# EAGLE board Soft_Servo (EAGLE 7.2.0)
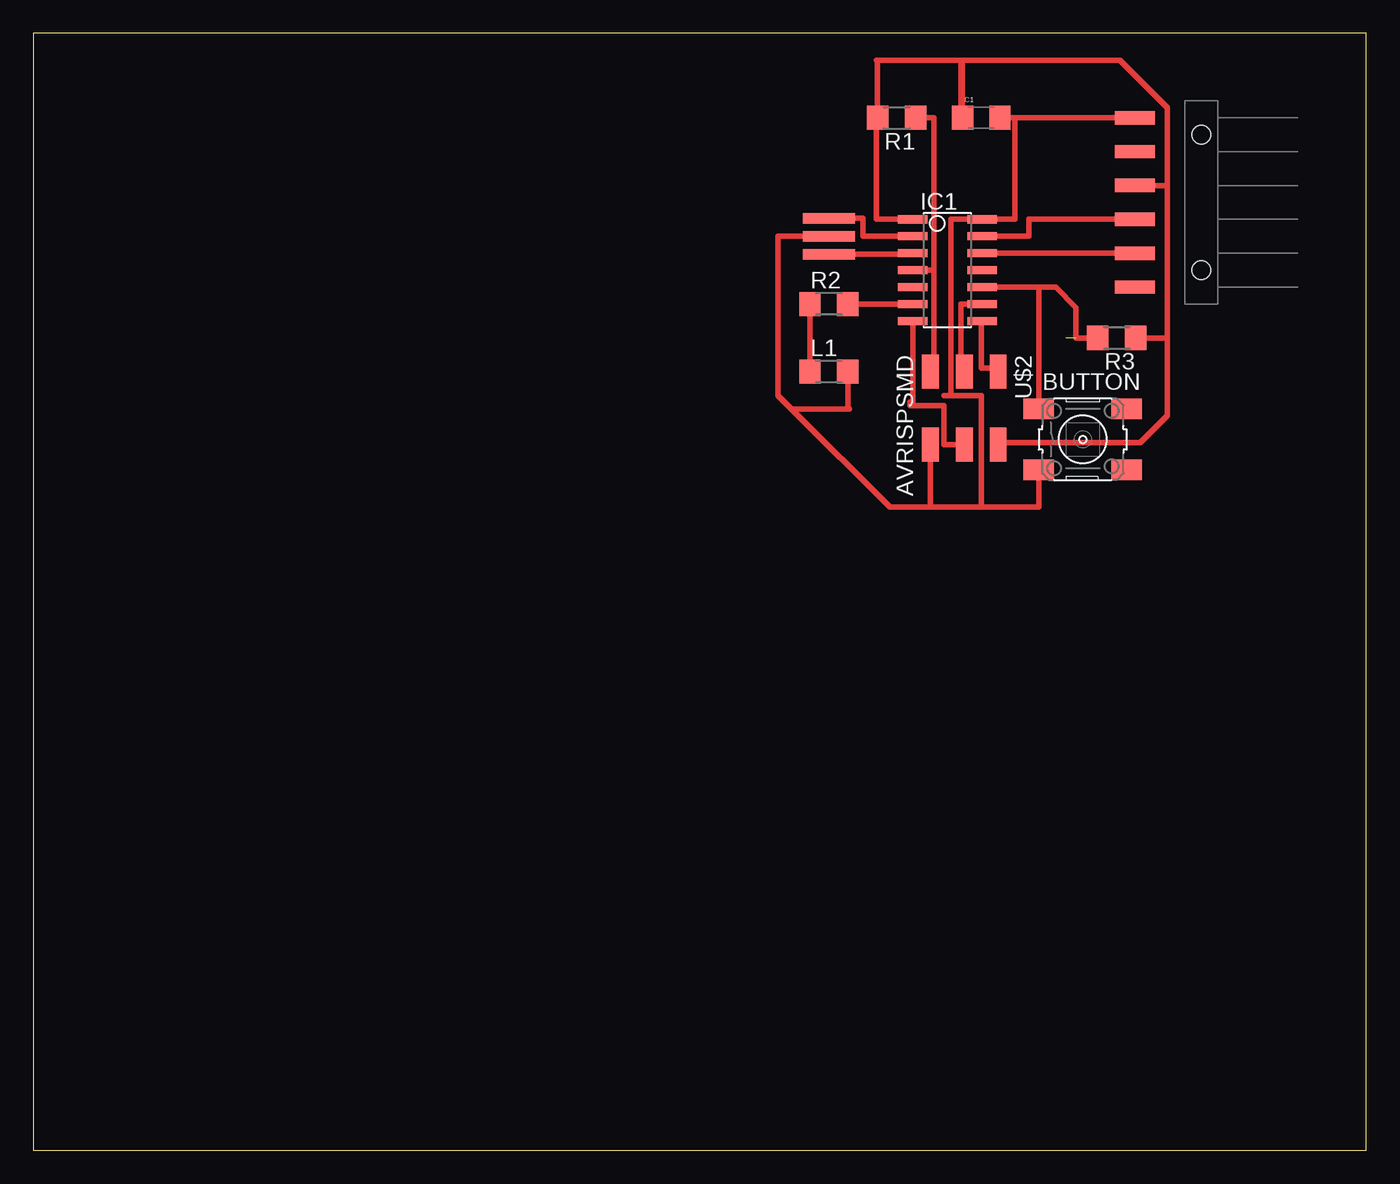
[diagram p0: board, top side]

Size 100 x 83.81 mm. Coordinates in mm from the lower left corner, seen from the top.
Outline: 0,0 100,0 100,83.81 0,83.81 0,0
Copper layers (1*16): Top 0.035mm / dielectric 1.5mm / Bottom 0.035mm
Design rules "default": minimum track width 10mil, minimum drill 24mil, track to track 8mil, track to pad 8mil, pad to pad 8mil, via to via 8mil, smd to smd 8mil, copper to edge 40mil, drill to drill 8mil, minimum pad ring 10mil, minimum via ring 8mil, stop-mask expansion 4mil, vias tented up to drill 0mil, thermal gap 10mil

## Footprints (pad centres in the part's own frame; a part is rotated, then mirrored left to right if it is on the bottom)
6MM_SWITCH = smd 2.286 x 1.524: 1 -3.302,2.286; 2 3.302,2.286; 3 -3.302,-2.286; 4 3.302,-2.286
1206 = smd 1.6 x 1.8: 1 -1.4,0; 2 1.4,0
SOIC14 = smd 0.61 x 2.21: 1 -3.81,-2.603; 2 -2.54,-2.603; 3 -1.27,-2.603; 4 0,-2.603; 5 1.27,-2.603; 6 2.54,-2.603; 7 3.81,-2.603; 8 3.81,2.603; 9 2.54,2.603; 10 1.27,2.603; 11 0,2.603; 12 -1.27,2.603; 13 -2.54,2.603; 14 -3.81,2.603
1X06-SMD = smd 1 x 3: 1 -6.35,5; 2 -3.81,5; 3 -1.27,5; 4 1.27,5; 5 3.81,5; 6 6.35,5 | hole 1.4: -5.08,0; 5.08,0
1206' = smd 1.6 x 1.803: 1 -1.422,0; 2 1.422,0
EFOBM = smd 0.8 x 3.9: 1 -1.35,0; 2 0,0; 3 1.35,0
2X03SMD = smd 2.54 x 1.27: 1 -2.54,2.54; 2 2.92,2.54; 3 -2.54,0; 4 2.92,0; 5 -2.54,-2.54; 6 2.92,-2.54

## Placement (x,y rotation side)
BUTTON  [6MM_SWITCH]  78.74,53.34 0 top
C1  1UF  [1206]  71.12,77.47 0 top
IC1  ATTINY44-SSU  [SOIC14]  68.58,66.04 270 top
JP2  [1X06-SMD]  87.63,71.12 90 top
L1  [1206']  59.69,58.42 0 top
R1  10K  [1206']  64.77,77.47 180 top
R2  500  [1206']  59.69,63.5 0 top
R3  10K  [1206']  81.28,60.96 180 top
U$1  RESONATOR  [EFOBM]  59.69,68.58 270 top
U$2  AVRISPSMD  [2X03SMD]  69.85,55.88 270 top

## Library data of the parts
BUTTON IC1 L1 R1-R3 U$2 = 01_FAB_Hello
C1 JP2 = 01_SparkFun
U$1 = 01_fab

## Nets
BUTTON: BUTTON.1 IC1.10 R3.2
CTS: JP2.5
GND: BUTTON.3 C1.2 IC1.14 JP2.6 L1.2 U$1.2 U$2.6
LED: IC1.6 R2.2
MISO: IC1.8 U$2.1
MOSI: IC1.7 U$2.4
N$1: IC1.2 U$1.1
N$2: L1.1 R2.1
N$3: IC1.3 U$1.3
RST: IC1.4 R1.1 U$2.5
RTS: JP2.1
RX: IC1.12 JP2.2
SCK: IC1.9 U$2.3
TX: IC1.13 JP2.3
VCC: C1.1 IC1.1 JP2.4 R1.2 R3.1 U$2.2

## Tracks (layer width: path | path; a pad name or v marks a point on that pad's centre or on a via)
BUTTON  (1 unrouted)
  Top 0.406: R3.2 78.23,60.96 78.23,63.25 76.71,64.77 75.44,64.77 | 75.44,64.77 BUTTON.1 | IC1.10 75.44,64.77
GND
  Top 0.406: JP2.6 C1.2 73.66,77.47 73.66,69.85 IC1.14 68.83,69.85 68.83,56.64 | U$1.2 55.88,68.58 55.88,56.64 56.9,55.63 | 71.12,48.26 75.44,48.26 BUTTON.3 | 71.12,48.26 67.31,48.26 | 67.31,48.26 U$2.6 | 68.33,56.64 68.83,56.64 | 68.83,56.64 71.12,56.64 71.12,48.26 | 56.9,55.63 64.26,48.26 67.31,48.26 | 56.9,55.63 61.21,55.63 61.11,55.73 L1.2
LED
  Top 0.406: R2.2 IC1.6
MISO
  Top 0.406: IC1.8 71.12,62.23 71.12,58.67 72.39,58.67 U$2.1
MOSI
  Top 0.406: U$2.4 68.33,52.96 68.33,55.88 65.79,55.88 65.79,56.13 65.98,56.13 IC1.7
N$1
  Top 0.406: U$1.1 62.23,69.93 62.23,68.58 IC1.2
N$2
  Top 0.406: R2.1 L1.1
N$3
  Top 0.406: U$1.3 65.98,67.23 IC1.3
RST
  Top 0.406: R1.1 67.56,77.47 67.56,66.04 | IC1.4 67.56,66.04 | 67.56,66.04 67.56,58.93 67.31,58.93 U$2.5
RX
  Top 0.406: JP2.2 IC1.12
SCK
  Top 0.406: U$2.3 69.6,58.42 69.6,63.5 IC1.9
TX
  Top 0.406: JP2.3 74.68,69.85 74.68,68.58 IC1.13
VCC
  Top 0.406: C1.1 69.85,77.47 | 63.35,80.01 R1.2 | JP2.4 85.09,72.39 | 85.09,72.39 85.09,60.96 | 85.09,60.96 R3.1 | R1.2 63.25,77.47 63.25,69.85 IC1.1 | U$2.2 72.52,53.09 83.06,53.09 85.09,55.12 85.09,60.96 | 85.09,72.39 85.09,78.23 81.53,81.79 69.72,81.79 C1.1 | 63.25,81.79 63.35,81.69 | 63.35,81.69 R1.2 | C1.1 69.6,77.47 69.6,81.79 63.35,81.79 63.35,81.69